# EAGLE board Zypher PCB for MIE (EAGLE 9.3.2)
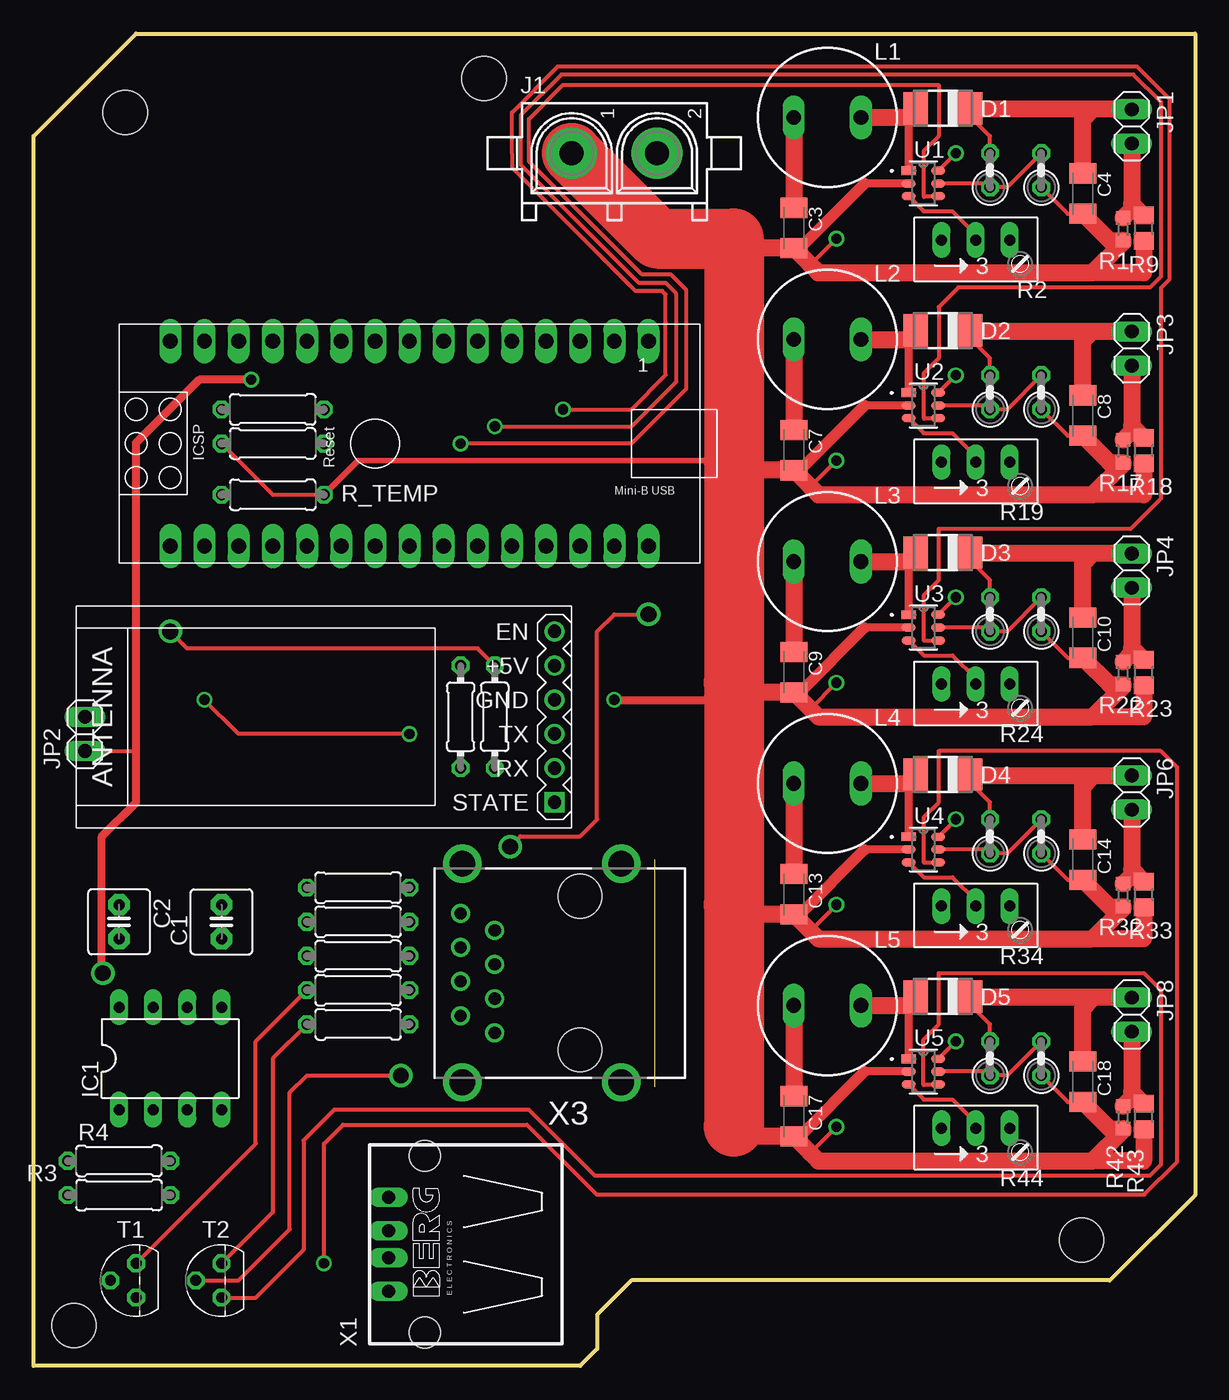
[diagram p0: board, top side]
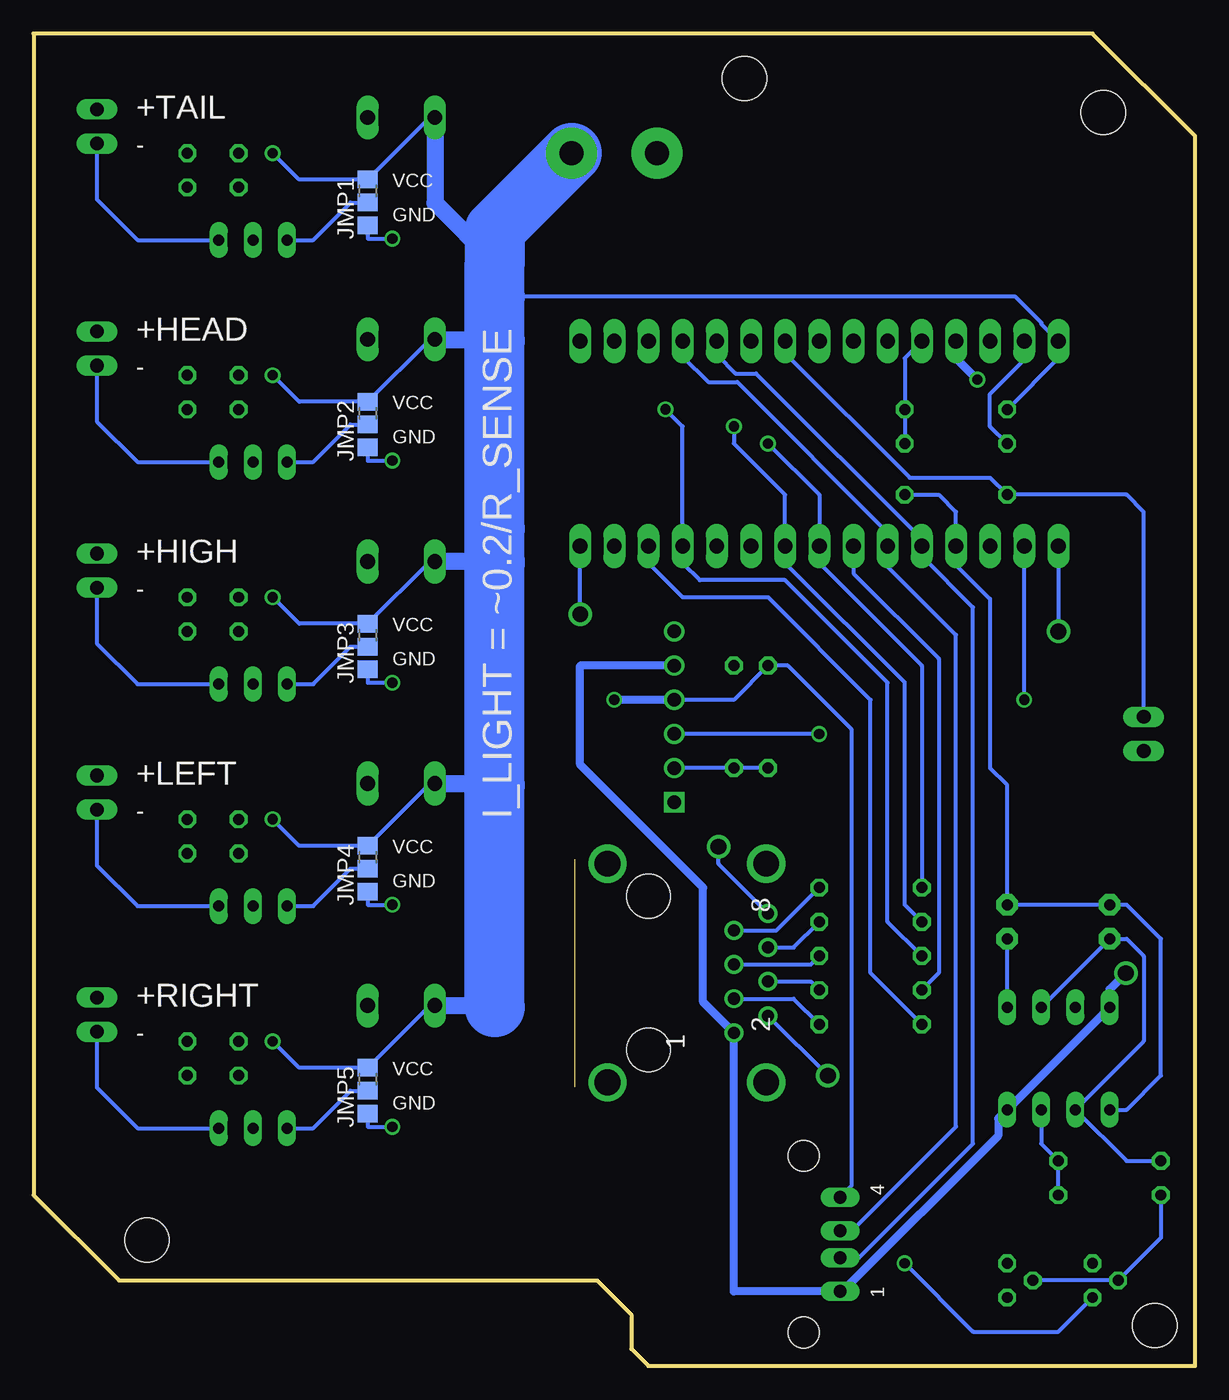
[diagram p1: board, bottom side, seen from below]

Size 86.36 x 99.06 mm. Coordinates in mm from the lower left corner, seen from the top.
Outline: 0,0 0,91.44 7.62,99.06 86.36,99.06 86.36,12.7 80.01,6.35 44.45,6.35 41.91,3.81 41.91,1.27 40.64,0 0,0
Copper layers (1*16): Top 0.035mm / dielectric 1.5mm / Bottom 0.035mm
Design rules "default *": minimum track width 10mil, minimum drill 0.35mm, track to track 6mil, track to pad 6mil, pad to pad 6mil, via to via 6mil, smd to smd 6mil, copper to edge 40mil, drill to drill 6mil, minimum pad ring 10mil, minimum via ring 8mil, stop-mask expansion 4mil, vias tented up to drill 0mil, thermal gap 10mil
Net classes: 0 default: width 0.305 mm, drill 0.762 mm, clearance 0.305 mm
Holes 3.3 mm at 6.81,93.19 3,3 33.5,95.73 77.93,9.35

## Footprints (pad centres in the part's own frame; a part is rotated, then mirrored left to right if it is on the bottom)
ARDUINO_NANO = drill 1.1 long: 1 -20.32,-7.62; 2 -17.78,-7.62; 3 -15.24,-7.62; 4 -12.7,-7.62; 5 -10.16,-7.62; 6 -7.62,-7.62; 7 -5.08,-7.62; 8 -2.54,-7.62; 9 0,-7.62; 10 2.54,-7.62; 11 5.08,-7.62; 12 7.62,-7.62; 13 10.16,-7.62; 14 12.7,-7.62; 15 15.24,-7.62; 16 15.24,7.62; 17 12.7,7.62; 18 10.16,7.62; 19 7.62,7.62; 20 5.08,7.62; 21 2.54,7.62; 22 0,7.62; 23 -2.54,7.62; 24 -5.08,7.62; 25 -7.62,7.62; 26 -10.16,7.62; 27 -12.7,7.62; 28 -15.24,7.62; 29 -17.78,7.62; 30 -20.32,7.62
C2.5-5 = drill 0.813 pad 1.6 octagon: 1 -1.27,0; 2 1.27,0
C1206K = smd 1.5 x 2: 1 -1.5,0; 2 1.5,0
DO-214AC = smd 1.8 x 2.4: A 2.025,0; C -2.025,0
DIL-08 = drill 0.813 long: 1 -3.81,-3.81; 2 -1.27,-3.81; 3 1.27,-3.81; 4 3.81,-3.81; 5 3.81,3.81; 6 1.27,3.81; 7 -1.27,3.81; 8 -3.81,3.81
350428-1 = drill 1.8 pad 3.81: 1 -3.175,0; 2 3.175,0
A0R-JMP = smd 1.5 x 1.3: 1 0,1.7; 2 0,0; 3 0,-1.7
1X02 = drill 1.016 long: 1 -1.27,0; 2 1.27,0
SD12K100 = drill 1.1 long: 1 -2.5,0; 2 2.5,0
R0603 = smd 1 x 1.1: 1 -0.85,0; 2 0.85,0
RJ9W = drill 0.813 long: A 2.54,0.635; E -2.54,0.635; S 0,0.635
0207/7 = drill 0.813 octagon: 1 -3.81,0; 2 3.81,0
0204/7 = drill 0.813 octagon: 1 -3.81,0; 2 3.81,0
0207/2V = drill 0.813 octagon: 1 -1.27,0; 2 1.27,0
R0805 = smd 1.3 x 1.5: 1 -0.95,0; 2 0.95,0
TO92 = drill 0.813 octagon: 1 1.27,0; 2 0,1.905; 3 -1.27,0
SOT23-6 = smd 1.06 x 0.65: 1 -1.1,0.95; 2 -1.1,0; 3 -1.1,-0.95; 4 1.1,-0.95; 5 1.1,0; 6 1.1,0.95
WIRELESS-BLUETOOTH-HC-05 = drill 1 square: 1 -6.35,-17.145 | drill 1: 2 -3.81,-17.145; 3 -1.27,-17.145; 4 1.27,-17.145; 5 3.81,-17.145; 6 6.35,-17.145
PN87520 = drill 0.95 long: 1 -3.5,2.71; 2 -1,2.71; 3 1,2.71; 4 3.5,2.71 | hole 2.3: -6.57,0; 6.57,0
RJ45-SHIELD1 = drill 0.9 pad 1.4: 1 -4.445,6.35; 2 -3.175,8.89; 3 -1.905,6.35; 4 -0.635,8.89; 5 0.635,6.35; 6 1.905,8.89; 7 3.175,6.35; 8 4.445,8.89 | drill 1.9 pad 2.5: S1 -8.128,-3.048; S2 8.128,-3.048; S3 -8.128,8.76; S4 8.128,8.76 | hole 3.251: -5.715,0; 5.715,0

## Placement (x,y rotation side)
ARDUINO_NANO1  NANO  [ARDUINO_NANO]  25.4,68.58 180 top
C1  10 E-9  [C2.5-5]  13.97,33.02 90 top
C2  47 E-6  [C2.5-5]  6.35,33.02 270 top
C3  10u  [C1206K]  56.53,84.6 270 top
C4  10u  [C1206K]  78.01,87.17 270 top
C7  10u  [C1206K]  56.53,68.09 270 top
C8  10u  [C1206K]  78.01,70.66 270 top
C9  10u  [C1206K]  56.53,51.58 270 top
C10  10u  [C1206K]  78.01,54.15 270 top
C13  10u  [C1206K]  56.53,35.07 270 top
C14  10u  [C1206K]  78.01,37.64 270 top
C17  10u  [C1206K]  56.53,18.56 270 top
C18  10u  [C1206K]  78.01,21.13 270 top
D1  [DO-214AC]  67.61,93.5 180 top
D2  [DO-214AC]  67.61,76.99 180 top
D3  [DO-214AC]  67.61,60.48 180 top
D4  [DO-214AC]  67.61,43.97 180 top
D5  [DO-214AC]  67.61,27.46 180 top
IC1  NE555  [DIL-08]  10.16,22.86 0 top
J1  350428-1  [350428-1]  43.18,90.17 0 top
JMP1  0R-JUMPA  [A0R-JMP]  61.52,86.5 0 bottom
JMP2  0R-JUMPA  [A0R-JMP]  61.52,69.99 0 bottom
JMP3  0R-JUMPA  [A0R-JMP]  61.52,53.48 0 bottom
JMP4  0R-JUMPA  [A0R-JMP]  61.52,36.97 0 bottom
JMP5  0R-JUMPA  [A0R-JMP]  61.52,20.46 0 bottom
JP1  TAIL  [1X02]  81.65,92.15 270 top
JP2  TEMP  [1X02]  3.81,46.99 90 top
JP3  HEAD  [1X02]  81.65,75.64 270 top
JP4  HIGH  [1X02]  81.65,59.13 270 top
JP6  LEFT  [1X02]  81.65,42.62 270 top
JP8  RIGHT  [1X02]  81.65,26.11 270 top
L1  10u  [SD12K100]  59.02,92.83 0 top
L2  10u  [SD12K100]  59.02,76.32 0 top
L3  10u  [SD12K100]  59.02,59.81 0 top
L4  10u  [SD12K100]  59.02,43.3 0 top
L5  10u  [SD12K100]  59.02,26.79 0 top
R1  820m  [R0603]  81.01,84.52 90 top
R2  10k  [RJ9W]  70.05,83.08 0 top
R3  100k  [0207/7]  6.35,12.7 180 top
R4  9860  [0207/7]  6.35,15.24 0 top
R5  2k  [0204/7]  31.75,48.26 270 top
R6  1k  [0204/7]  34.29,48.26 90 top
R7  10k  [0207/2V]  71.12,88.9 90 top
R8  10k  [0207/7]  17.78,71.12 0 top
R9  200m  [R0805]  82.55,84.58 90 top
R10  10k  [0207/2V]  74.93,88.9 90 top
R11  10k  [0207/7]  24.13,25.4 0 top
R12  10k  [0207/7]  24.13,27.94 0 top
R13  10k  [0207/7]  24.13,30.48 0 top
R14  10k  [0207/7]  24.13,33.02 0 top
R15  10k  [0207/7]  24.13,35.56 0 top
R16  5k  [0207/7]  17.78,68.58 180 top
R17  820m  [R0603]  81.01,68.01 90 top
R18  200m  [R0805]  82.55,68.07 90 top
R19  10k  [RJ9W]  70.05,66.57 0 top
R20  10k  [0207/2V]  71.12,72.39 90 top
R21  10k  [0207/2V]  74.93,72.39 90 top
R22  820m  [R0603]  81.01,51.5 90 top
R23  200m  [R0805]  82.55,51.56 90 top
R24  10k  [RJ9W]  70.05,50.06 0 top
R25  10k  [0207/2V]  71.12,55.88 90 top
R26  10k  [0207/2V]  74.93,55.88 90 top
R32  820m  [R0603]  81.01,34.99 90 top
R33  200m  [R0805]  82.55,35.05 90 top
R34  10k  [RJ9W]  70.05,33.55 0 top
R35  10k  [0207/2V]  71.12,39.37 90 top
R36  10k  [0207/2V]  74.93,39.37 90 top
R42  820m  [R0603]  81.01,18.48 90 top
R43  200m  [R0805]  82.55,18.54 90 top
R44  10k  [RJ9W]  70.05,17.04 0 top
R45  10k  [0207/2V]  71.12,22.86 90 top
R46  10k  [0207/2V]  74.93,22.86 90 top
R_TEMP  10k  [0207/7]  17.78,64.77 180 top
T1  2N3904  [TO92]  7.62,6.35 90 top
T2  2N3904  [TO92]  13.97,6.35 90 top
U1  AP3031KTR-G1  [SOT23-6]  66.17,87.92 0 top
U2  AP3031KTR-G1  [SOT23-6]  66.17,71.41 0 top
U3  AP3031KTR-G1  [SOT23-6]  66.17,54.9 0 top
U4  AP3031KTR-G1  [SOT23-6]  66.17,38.39 0 top
U5  AP3031KTR-G1  [SOT23-6]  66.17,21.88 0 top
U$1  HC-05  [WIRELESS-BLUETOOTH-HC-05]  21.59,48.26 90 top
X1  HALLSENS  [PN87520]  29.1,9.04 90 top
X3  LIGHTPNL  [RJ45-SHIELD1]  40.64,29.21 90 top

## Library data of the parts
ARDUINO_NANO1 = MIE346, Design Assignment 3 - ArduinoNanoV40
C1 C2 = capacitor-wima
C3 C4 C7-C10 C13 C14 C17 C18 = rcl; SPICEPREFIX: C
D1-D5 = diode
IC1 = st-microelectronics; MF: Arrow Electronics; MPN: NE555N; OC_FARNELL: 1467742; OC_NEWARK: 89K1486
J1 = con-amp
JMP1-JMP5 = jump-0r-smd
JP1-JP4 JP6 JP8 = pinhead
L1-L5 = inductor-neosid; OC_FARNELL: unknown; OC_NEWARK: unknown
R1 R7 R9 R10 R17 R18 R20-R23 R25 R26 R32 R33 R35 R36 R42 R43 R45 R46 = resistor
R2 R19 R24 R34 R44 = pot
R3-R6 R8 R11-R16 R_TEMP = rcl; SPICEPREFIX: R
T1 T2 = transistor
U1-U5 = Lighting IC; MANUFACTURER_PART_NUMBER: AP3031KTRG1; VENDOR: Diodes Inc
U$1 = diy-modules
X1 = con-berg; OC_FARNELL: unknown; OC_NEWARK: unknown
X3 = con-tycoelectronics; OC_FARNELL: unknown; OC_NEWARK: unknown

## Nets
+3V3: ARDUINO_NANO1.2
+5V: ARDUINO_NANO1.12 IC1.4 IC1.8 JP2.1 U$1.5 X1.1 X3.1
BATLVL: ARDUINO_NANO1.11 R8.2 R16.1
CLK: ARDUINO_NANO1.1
GND: ARDUINO_NANO1.14 ARDUINO_NANO1.19 C1.2 C2.1 C3.2 C4.2 C7.2 C8.2 C9.2 C10.2 C13.2 C14.2 C17.2 C18.2 IC1.1 J1.1 JMP1.3 JMP2.3 JMP3.3 JMP4.3 JMP5.3 R1.1 R5.1 R9.1 R10.1 R16.2 R17.1 R18.1 R21.1 R22.1 R23.1 R26.1 R32.1 R33.1 R36.1 R42.1 R43.1 R46.1 R_TEMP.1 U1.2 U2.2 U3.2 U4.2 U5.2 U$1.4 X1.4
HALL1: ARDUINO_NANO1.4 ARDUINO_NANO1.21 X1.3
HALL2: ARDUINO_NANO1.5 ARDUINO_NANO1.20 X1.2
HEAD_CTRL: ARDUINO_NANO1.24 R14.1 U2.4
HIGH_CTRL: ARDUINO_NANO1.27 R13.1 U3.4
LEFT+: C14.1 D4.C JP6.1 R35.2
LEFT-: JP6.2 R32.2 R33.2 R34.A
LEFT_CTRL: T1.3 U4.4
LEFT_IND: ARDUINO_NANO1.22 R12.1 T1.1
MISO: ARDUINO_NANO1.30 X3.8
MOSI: ARDUINO_NANO1.29
N$1: D1.A L1.2 U1.1
N$2: C1.1 IC1.5
N$3: C4.1 D1.C JP1.1 R7.2
N$4: C2.2 IC1.2 IC1.6 R4.1
N$5: IC1.3 R3.1 R4.2
N$6: R2.S U1.3
N$7: JP1.2 R1.2 R2.A R9.2
N$8: JMP1.2 R2.E
N$12: R5.2 R6.1 U$1.2
N$20: R7.1 R10.2 U1.5
N$26: R14.2 X3.6
N$28: R13.2 X3.5
N$29: R11.2 X3.3
N$30: R12.2 X3.4
N$31: R15.2 X3.7
N$35: D2.A L2.2 U2.1
N$36: C8.1 D2.C JP3.1 R20.2
N$37: JP3.2 R17.2 R18.2 R19.A
N$38: R19.S U2.3
N$39: JMP2.2 R19.E
N$40: R20.1 R21.2 U2.5
N$42: D3.A L3.2 U3.1
N$43: C10.1 D3.C JP4.1 R25.2
N$44: JP4.2 R22.2 R23.2 R24.A
N$45: R24.S U3.3
N$46: JMP3.2 R24.E
N$47: R25.1 R26.2 U3.5
N$56: D4.A L4.2 U4.1
N$59: R34.S U4.3
N$60: JMP4.2 R34.E
N$61: R35.1 R36.2 U4.5
N$70: D5.A L5.2 U5.1
N$73: R44.S U5.3
N$74: JMP5.2 R44.E
N$75: R45.1 R46.2 U5.5
NF24_ENABLE: ARDUINO_NANO1.25
NF24_SELECT: ARDUINO_NANO1.26
PULSE: R3.2 T1.2 T2.2 X3.2
RIGHT+: C18.1 D5.C JP8.1 R45.2
RIGHT-: JP8.2 R42.2 R43.2 R44.A
RIGHT_CTRL: T2.3 U5.4
RIGHT_IND: ARDUINO_NANO1.28 R11.1 T2.1
RX: ARDUINO_NANO1.17 U$1.3
TAIL_CTRL: ARDUINO_NANO1.23 R15.1 U1.4
TEMP: ARDUINO_NANO1.7 JP2.2 R_TEMP.2
TX: ARDUINO_NANO1.16 R6.2
VCC: ARDUINO_NANO1.15 C3.1 C7.1 C9.1 C13.1 C17.1 J1.2 JMP1.1 JMP2.1 JMP3.1 JMP4.1 JMP5.1 L1.1 L2.1 L3.1 L4.1 L5.1 R8.1 U1.6 U2.6 U3.6 U4.6 U5.6

## Tracks (layer width: path | path; a pad name or v marks a point on that pad's centre or on a via)
+5V  (via drill 0.76, 1.17)
  Top 0.305: JP2.1 7.62,45.72 | v5.14,29.21 5.08,29.27
  Top 0.61: v16.18,73.33 12.31,73.33 7.62,68.64 7.62,45.72 7.62,41.91 5.08,39.37 5.08,29.27
  Bottom 0.305: 26.21,5.54 X1.1 | ARDUINO_NANO1.12 17.78,74.93
  Bottom 0.61: X1.1 34.29,5.54 X3.1 36.58,27.05 36.58,35.56 45.72,44.7 45.72,52.07 U$1.5 | 17.78,74.93 v16.18,73.33 | 26.21,5.54 14.63,17.12 14.63,18.39 IC1.4 IC1.8 6.35,28 v5.14,29.21
BATLVL
  Bottom 0.305: R16.1 R8.2 21.59,74.93 ARDUINO_NANO1.11
GND  (via drill 0.76)
  Top 0.305: v59.69,83.82 57.75,81.88 | R10.1 76.89,85.67 C4.2 | v59.69,67.31 57.75,65.37 | R21.1 76.89,69.16 C8.2 | v59.69,50.8 57.75,48.86 | R26.1 76.89,52.65 C10.2 | v59.69,34.29 57.75,32.35 | R36.1 76.89,36.14 C14.2 | v59.69,17.78 57.75,15.84 | R46.1 76.89,19.63 C18.2 | R16.2 17.78,64.77 R_TEMP.1
  Top 0.406: R_TEMP.1 24.13,67.31 52.07,67.31
  Top 0.61: U1.2 61.79,87.92 | U2.2 61.79,71.41 | U3.2 61.79,54.9 | U4.2 61.79,38.39 | U5.2 61.79,21.88 | v43.18,49.53 52.07,49.53
  Top 0.813: 61.79,87.92 56.97,83.1 C3.2 | 61.79,71.41 56.97,66.59 C7.2 | 61.79,54.9 56.97,50.08 C9.2 | 61.79,38.39 56.97,33.57 C13.2 | 61.79,21.88 56.97,17.06 C17.2
  Top 1.27: C4.2 80.01,83.67 R1.1 81.01,83.55 78.74,81.28 | 78.74,81.28 58.35,81.28 57.75,81.88 C3.2 52.79,83.1 52.07,83.82 | R9.1 82.55,81.28 78.74,81.28 | C8.2 80.01,67.16 R17.1 81.01,67.04 78.74,64.77 | 78.74,64.77 58.35,64.77 57.75,65.37 C7.2 52.79,66.59 52.07,67.31 | R18.1 82.55,64.77 78.74,64.77 | C10.2 80.01,50.65 R22.1 81.01,50.53 78.74,48.26 | 78.74,48.26 58.35,48.26 57.75,48.86 C9.2 52.79,50.08 52.07,50.8 | R23.1 82.55,48.26 78.74,48.26 | C14.2 80.01,34.14 R32.1 81.01,34.02 78.74,31.75 | 78.74,31.75 58.35,31.75 57.75,32.35 C13.2 52.79,33.57 52.07,34.29 | R33.1 82.55,31.75 78.74,31.75 | C18.2 80.01,17.63 R42.1 81.01,17.51 78.74,15.24 | 78.74,15.24 58.35,15.24 57.75,15.84 C17.2 52.79,17.06 52.07,17.78 | R43.1 82.55,15.24 78.74,15.24
  Top 4.445: 52.07,17.78 52.07,34.29 52.07,49.53 52.07,50.8 52.07,67.31 52.07,83.82 46.35,83.82 J1.1
  Bottom 0.305: JMP1.3 61.52,83.82 v59.69,83.82 | JMP2.3 61.52,67.31 v59.69,67.31 | JMP3.3 61.52,50.8 v59.69,50.8 | JMP4.3 61.52,34.29 v59.69,34.29 | JMP5.3 61.52,17.78 v59.69,17.78 | U$1.4 34.29,49.53 R5.1 30.28,52.07 25.55,47.34 25.55,13.38 X1.4 | ARDUINO_NANO1.14 12.7,74.8 15.24,72.26 15.24,69.85 R16.2 | R_TEMP.1 19.05,64.77 17.78,63.5 ARDUINO_NANO1.19 17.78,59.56 15.24,57.02 15.24,44.45 13.97,43.18 C1.2 C2.1 5.08,34.29 2.54,31.75 2.54,21.59 5.08,19.05 IC1.1
  Bottom 0.61: U$1.4 v43.18,49.53
HALL1
  Bottom 0.305: X1.3 25.52,10.04 17.78,17.78 17.78,54.36 22.86,59.44 ARDUINO_NANO1.21 22.86,61.98 34.04,73.15 36.2,73.15 38.1,75.06 ARDUINO_NANO1.4
HALL2
  Bottom 0.305: ARDUINO_NANO1.5 35.56,75.18 34.16,73.79 32.64,73.79 20.32,61.47 ARDUINO_NANO1.20 20.32,60.2 16.51,56.39 16.51,16.51 24.98,8.04 X1.2
HEAD_CTRL  (via drill 0.76)
  Top 0.305: U2.4 67.23,70.42 66.21,70.42 66.21,73.83 67.31,74.93 67.31,78.74 68.76,80.19 83,80.19 83.82,81 83.82,93.98 81.79,96.01 39.24,96.01 36.22,92.99 36.22,89.3 44.99,80.53 46.99,80.53 47.75,79.77 47.75,73.15 44.45,69.85 v34.29,69.85
  Bottom 0.305: v34.29,69.85 34.29,68.58 30.48,64.77 ARDUINO_NANO1.24 30.48,59.69 21.59,50.8 21.59,34.29 R14.1
HIGH_CTRL  (via drill 0.76)
  Top 0.305: U3.4 67.23,53.91 66.21,53.91 66.21,57.32 67.31,58.42 67.31,62.23 81.56,62.23 83.82,64.5 83.82,80.14 84.43,80.75 84.43,94.23 82.04,96.62 38.99,96.62 35.56,93.19 35.56,90.17 35.61,90.12 35.61,89.05 44.74,79.92 46.74,79.92 46.99,79.67 46.99,77.57 47,77.56 47,73.67 44.45,71.12 v39.37,71.12
  Bottom 0.305: v39.37,71.12 38.1,69.85 ARDUINO_NANO1.27 38.1,59.69 36.83,58.42 30.48,58.42 22.86,50.8 22.86,33.02 R13.1
LEFT+
  Top 0.305: D4.C 69.64,43.4 71.12,41.91 R35.2
  Top 1.27: D4.C 69.71,43.89 78.74,43.89 | C14.1 78.01,43.1 78.74,43.83 78.74,43.89 | 78.74,43.89 JP6.1
LEFT-
  Top 1.27: R32.2 81.65,36.48 81.65,36.9 | JP6.2 81.65,36.9 | R33.2 81.65,36.9
  Bottom 0.305: JP6.2 81.65,37.2 78.64,34.19 R34.A
LEFT_CTRL  (via drill 0.76)
  Top 0.305: U4.4 67.23,37.41 66.21,37.41 66.21,40.81 67.31,41.91 67.31,45.72 83.82,45.72 85.04,44.5 85.04,15.19 82.6,12.75 41.86,12.75 36.68,17.93 23.01,17.93 21.59,16.51 v21.59,7.62
  Bottom 0.305: v21.59,7.62 16.51,2.54 10.16,2.54 T1.3
LEFT_IND
  Top 0.305: T1.1 16.51,16.51 16.51,24.13 R12.1
  Bottom 0.305: R12.1 19.05,29.21 19.05,52.58 25.4,58.93 ARDUINO_NANO1.22
MISO  (via drill 1.17)
  Top 0.305: v35.43,38.61 36.2,39.37 40.64,39.37 41.91,40.64 41.91,54.61 43.18,55.88 v45.72,55.88
  Bottom 0.305: X3.8 35.43,37.34 v35.43,38.61 | v45.72,55.88 ARDUINO_NANO1.30
N$1
  Top 0.61: U1.1 65.07,92.94
  Top 0.813: 65.07,92.94 65.05,92.96
  Top 1.27: L1.2 64.92,92.83 65.05,92.96 D1.A
N$2
  Bottom 0.305: IC1.5 C1.1
N$3
  Top 0.305: D1.C 69.64,92.92 71.12,91.44 R7.2
  Top 1.27: D1.C 69.71,93.42 78.74,93.42 | JP1.1 78.74,93.42 | 78.74,93.42 78.01,92.69 C4.1
N$4
  Bottom 0.305: IC1.6 C2.2 5.08,31.75 3.81,30.48 3.81,24.13 6.35,21.59 IC1.2 5.08,15.24 R4.1
N$5
  Bottom 0.305: IC1.3 11.43,16.51 R4.2 R3.1
N$6
  Top 0.305: U1.3 66.19,85.85 68.33,85.85 70.05,84.13 R2.S
N$7
  Top 1.27: R1.2 81.65,86.01 81.65,86.43 | JP1.2 81.65,86.43 | R9.2 81.65,86.43
  Bottom 0.305: JP1.2 81.65,86.73 78.64,83.72 R2.A
N$8
  Bottom 0.305: R2.E 65.58,83.72 62.79,86.5 JMP1.2
N$12
  Bottom 0.305: R5.2 R6.1 U$1.2
N$20
  Top 0.305: U1.5 70.83,87.92 R7.1 72.39,87.63 R10.2
N$26
  Bottom 0.305: X3.6 29.84,31.11 R14.2
N$28
  Bottom 0.305: X3.5 28.57,29.84 R13.2
N$29
  Bottom 0.305: X3.3 29.84,27.3 R11.2
N$30
  Bottom 0.305: X3.4 28.57,28.57 R12.2
N$31
  Bottom 0.305: X3.7 31.11,32.38 R15.2
N$35
  Top 0.61: U2.1 65.07,76.42
  Top 0.813: 65.07,76.42 65.05,76.45
  Top 1.27: L2.2 64.92,76.32 65.05,76.45 D2.A
N$36
  Top 0.305: D2.C 69.64,76.42 71.12,74.93 R20.2
  Top 1.27: JP3.1 78.74,76.91 | 78.74,76.91 69.71,76.91 D2.C | 78.74,76.91 78.01,76.18 C8.1
N$37
  Top 1.27: R17.2 81.65,69.5 81.65,69.92 | JP3.2 81.65,69.92 | R18.2 81.65,69.92
  Bottom 0.305: JP3.2 81.65,70.22 78.64,67.2 R19.A
N$38
  Top 0.305: U2.3 66.19,69.34 68.33,69.34 70.05,67.62 R19.S
N$39
  Bottom 0.305: R19.E 65.58,67.2 62.79,69.99 JMP2.2
N$40
  Top 0.305: U2.5 70.83,71.41 R20.1 72.39,71.12 R21.2
N$42
  Top 0.61: U3.1 65.07,59.91
  Top 0.813: 65.07,59.91 65.05,59.94
  Top 1.27: L3.2 64.92,59.81 65.05,59.94 D3.A
N$43
  Top 0.305: D3.C 69.64,59.91 71.12,58.42 R25.2
  Top 1.27: JP4.1 78.74,60.4 | 78.74,60.4 69.71,60.4 D3.C | 78.74,60.4 78.01,59.67 C10.1
N$44
  Top 1.27: R22.2 81.65,52.99 81.65,53.41 | JP4.2 81.65,53.41 | R23.2 81.65,53.41
  Bottom 0.305: JP4.2 81.65,53.71 78.64,50.7 R24.A
N$45
  Top 0.305: U3.3 66.19,52.83 68.33,52.83 70.05,51.11 R24.S
N$46
  Bottom 0.305: R24.E 65.58,50.7 62.79,53.48 JMP3.2
N$47
  Top 0.305: U3.5 70.83,54.9 R25.1 72.39,54.61 R26.2
N$56
  Top 0.61: U4.1 65.07,43.41
  Top 0.813: 65.07,43.41 65.05,43.43
  Top 1.27: L4.2 64.92,43.3 65.05,43.43 D4.A
N$59
  Top 0.305: U4.3 66.19,36.32 68.33,36.32 70.05,34.6 R34.S
N$60
  Bottom 0.305: R34.E 65.58,34.19 62.79,36.97 JMP4.2
N$61
  Top 0.305: U4.5 70.83,38.39 R35.1 72.39,38.1 R36.2
N$70
  Top 0.61: U5.1 65.07,26.89
  Top 0.813: 65.07,26.89 65.05,26.92
  Top 1.27: L5.2 64.92,26.79 65.05,26.92 D5.A
N$73
  Top 0.305: U5.3 66.19,19.81 68.33,19.81 70.05,18.09 R44.S
N$74
  Bottom 0.305: R44.E 65.58,17.68 62.79,20.46 JMP5.2
N$75
  Top 0.305: U5.5 70.83,21.88 R45.1 72.39,21.59 R46.2
PULSE  (via drill 1.17)
  Top 0.305: v27.3,21.59 20.32,21.59 19.05,20.32 19.05,10.16 15.24,6.35 T2.2
  Bottom 0.305: R3.2 2.54,9.53 T1.2 T2.2 | v27.3,21.59 X3.2
RIGHT+
  Top 0.305: D5.C 69.64,26.89 71.12,25.4 R45.2
  Top 1.27: JP8.1 78.74,27.38 | 78.74,27.38 69.71,27.38 D5.C | C18.1 78.01,26.59 78.74,27.32 78.74,27.38
RIGHT-
  Top 1.27: R42.2 81.65,19.97 81.65,20.39 | JP8.2 81.65,20.39 | R43.2 81.65,20.39
  Bottom 0.305: JP8.2 81.65,20.69 78.64,17.68 R44.A
RIGHT_CTRL
  Top 0.305: U5.4 67.23,20.89 66.17,20.89 66.17,24.26 67.31,25.4 67.31,29.21 82.55,29.21 83.82,27.94 83.82,14.96 83,14.15 41.73,14.15 36.83,19.05 22.35,19.05 20.07,16.76 20.07,8.64 16.51,5.08 T2.3
RIGHT_IND
  Top 0.305: R11.1 17.78,22.86 17.78,11.43 T2.1
  Bottom 0.305: R11.1 24.13,29.21 24.13,49.53 31.75,57.15 38.1,57.15 40.64,59.69 ARDUINO_NANO1.28
RX  (via drill 0.76)
  Top 0.305: v27.94,46.99 15.24,46.99 v12.7,49.53
  Bottom 0.305: v27.94,46.99 U$1.3 | v12.7,49.53 ARDUINO_NANO1.17
TAIL_CTRL  (via drill 0.76)
  Top 0.305: U1.4 67.23,86.94 66.21,86.94 66.21,90.34 67.31,91.44 67.31,95.25 39.37,95.25 36.83,92.71 36.83,89.56 45.24,81.14 47.38,81.14 48.51,80.01 48.51,72.64 44.45,68.58 v31.75,68.58
  Bottom 0.305: v31.75,68.58 27.94,64.77 ARDUINO_NANO1.23 27.94,59.69 20.32,52.07 R15.1
TEMP
  Bottom 0.305: JP2.2 3.81,63.5 5.08,64.77 R_TEMP.2 15.24,66.04 21.21,66.04 30.48,75.31 ARDUINO_NANO1.7
TX  (via drill 1.17)
  Top 0.305: R6.2 33.02,53.34 11.43,53.34 v10.16,54.61
  Bottom 0.305: ARDUINO_NANO1.16 v10.16,54.61
VCC  (via drill 0.76)
  Top 0.254: v68.58,57.15 v68.57,57.15 | v68.58,40.64 v68.57,40.64 | v68.58,24.13 v68.57,24.13
  Top 0.305: v68.58,90.17 v68.57,90.17 U1.6 | v68.58,73.66 v68.57,73.66 U2.6 | v68.57,57.15 U3.6 | v68.57,40.64 U4.6 | v68.57,24.13 U5.6
  Top 1.27: L1.1 C3.1 | L2.1 C7.1 | L3.1 C9.1 | L4.1 C13.1 | L5.1 C17.1
  Bottom 0.305: L1.1 56.89,92.83 JMP1.1 66.61,88.2 v68.58,90.17 | L2.1 56.89,76.32 JMP2.1 66.61,71.69 v68.58,73.66 | L3.1 56.89,59.81 JMP3.1 66.61,55.18 v68.58,57.15 | L4.1 56.89,43.3 JMP4.1 66.61,38.67 v68.58,40.64 | L5.1 56.89,26.79 JMP5.1 66.61,22.16 v68.58,24.13 | R8.1 10.16,74.93 ARDUINO_NANO1.15 11.42,77.46 11.42,77.56 13.35,79.49 52.07,79.49
  Bottom 1.27: L1.1 56.52,86.48 52.07,82.03 | L5.1 52.19,26.79 52.07,26.67 | L4.1 52.19,43.3 52.07,43.18 | L2.1 52.19,76.32 52.07,76.2 | L3.1 52.19,59.81 52.07,59.69 52.07,62.23
  Bottom 4.445: 52.07,26.67 52.07,43.18 52.07,59.69 | 52.07,59.81 52.07,62.23 52.07,76.2 52.07,79.49 52.07,82.03 52.07,84.45 J1.2

## Text on the board
bNames: +TAIL | - | VCC | GND | +HEAD | - | VCC | GND | +HIGH | - | VCC | GND | +LEFT | I_LIGHT = ~0.2/R_SENSE | - | VCC | GND | 8 | +RIGHT | 2 | 1 | - | VCC | GND | 4 | 1